# Altium PCB ECL.PcbDoc
Units mil, origin at the board's own origin, x right, y up, seen from the top; angles counter-clockwise.
Board outline 6000 x 4000 mil, 2 copper layers (Top Layer, Bottom Layer); 22 components, 15 nets, 52 pads, 0 vias.
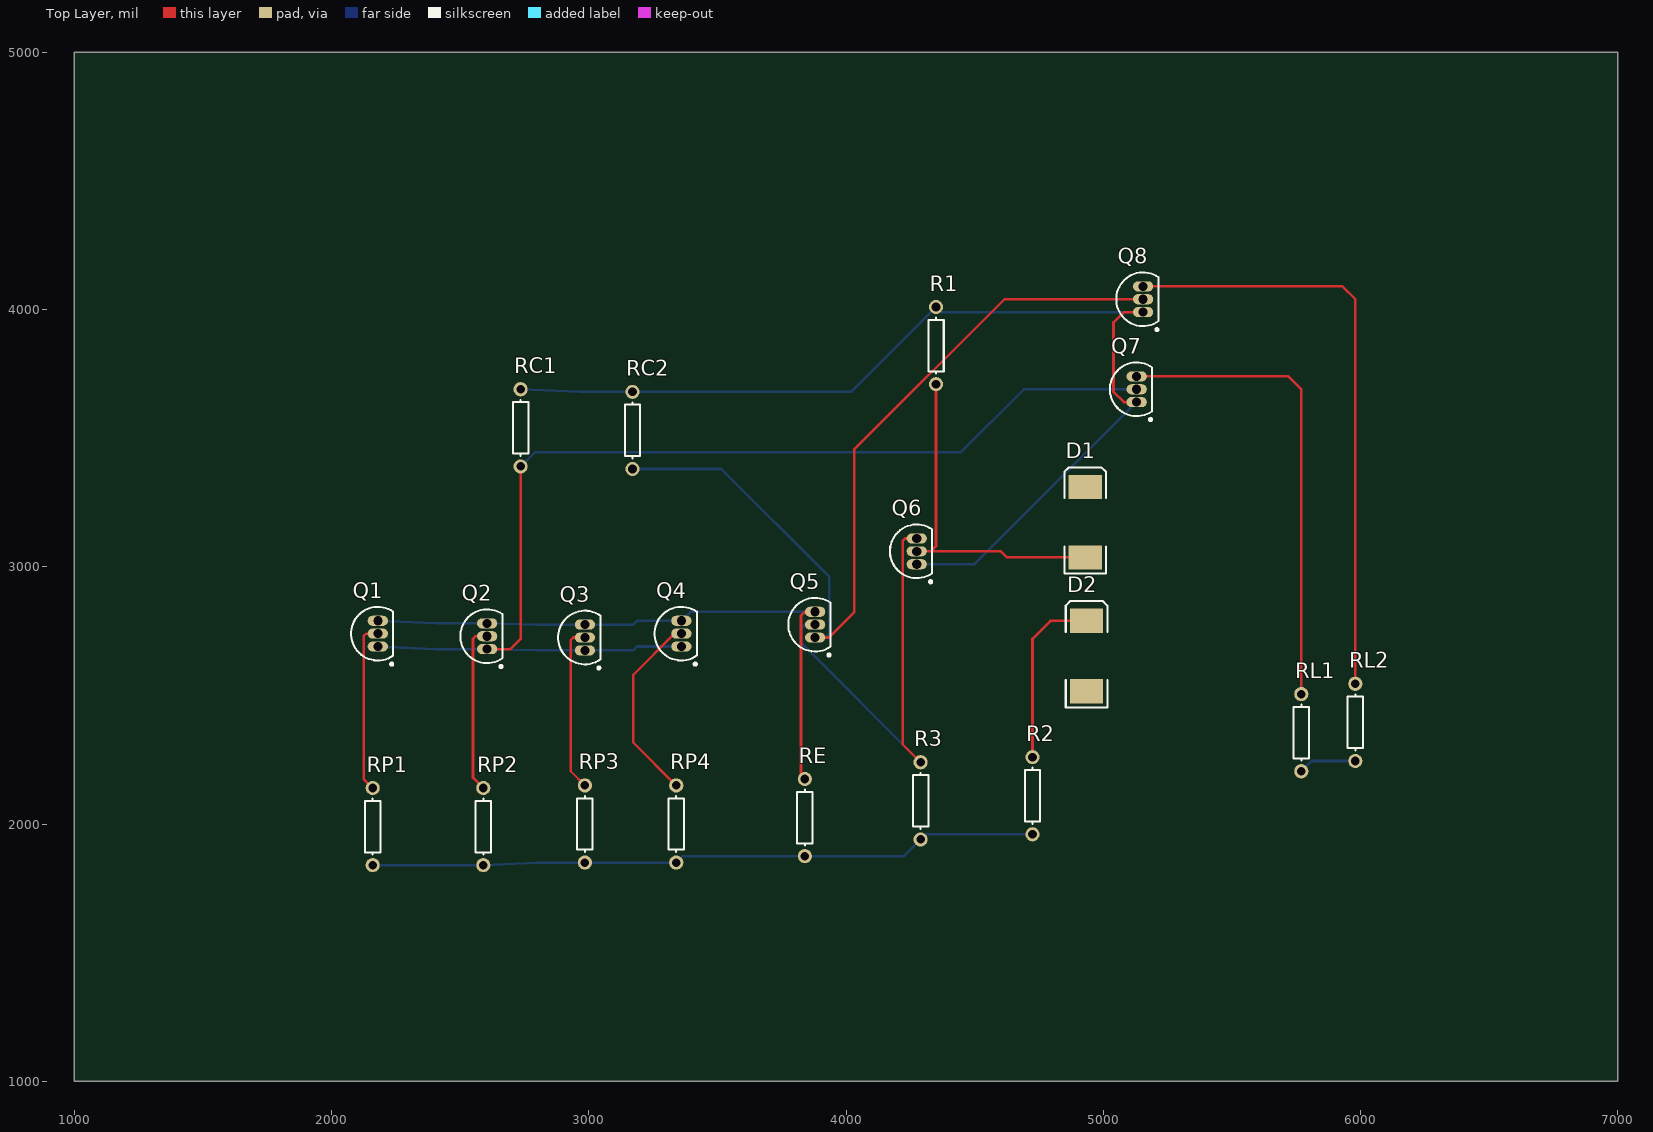
[diagram p0: Top Layer view]
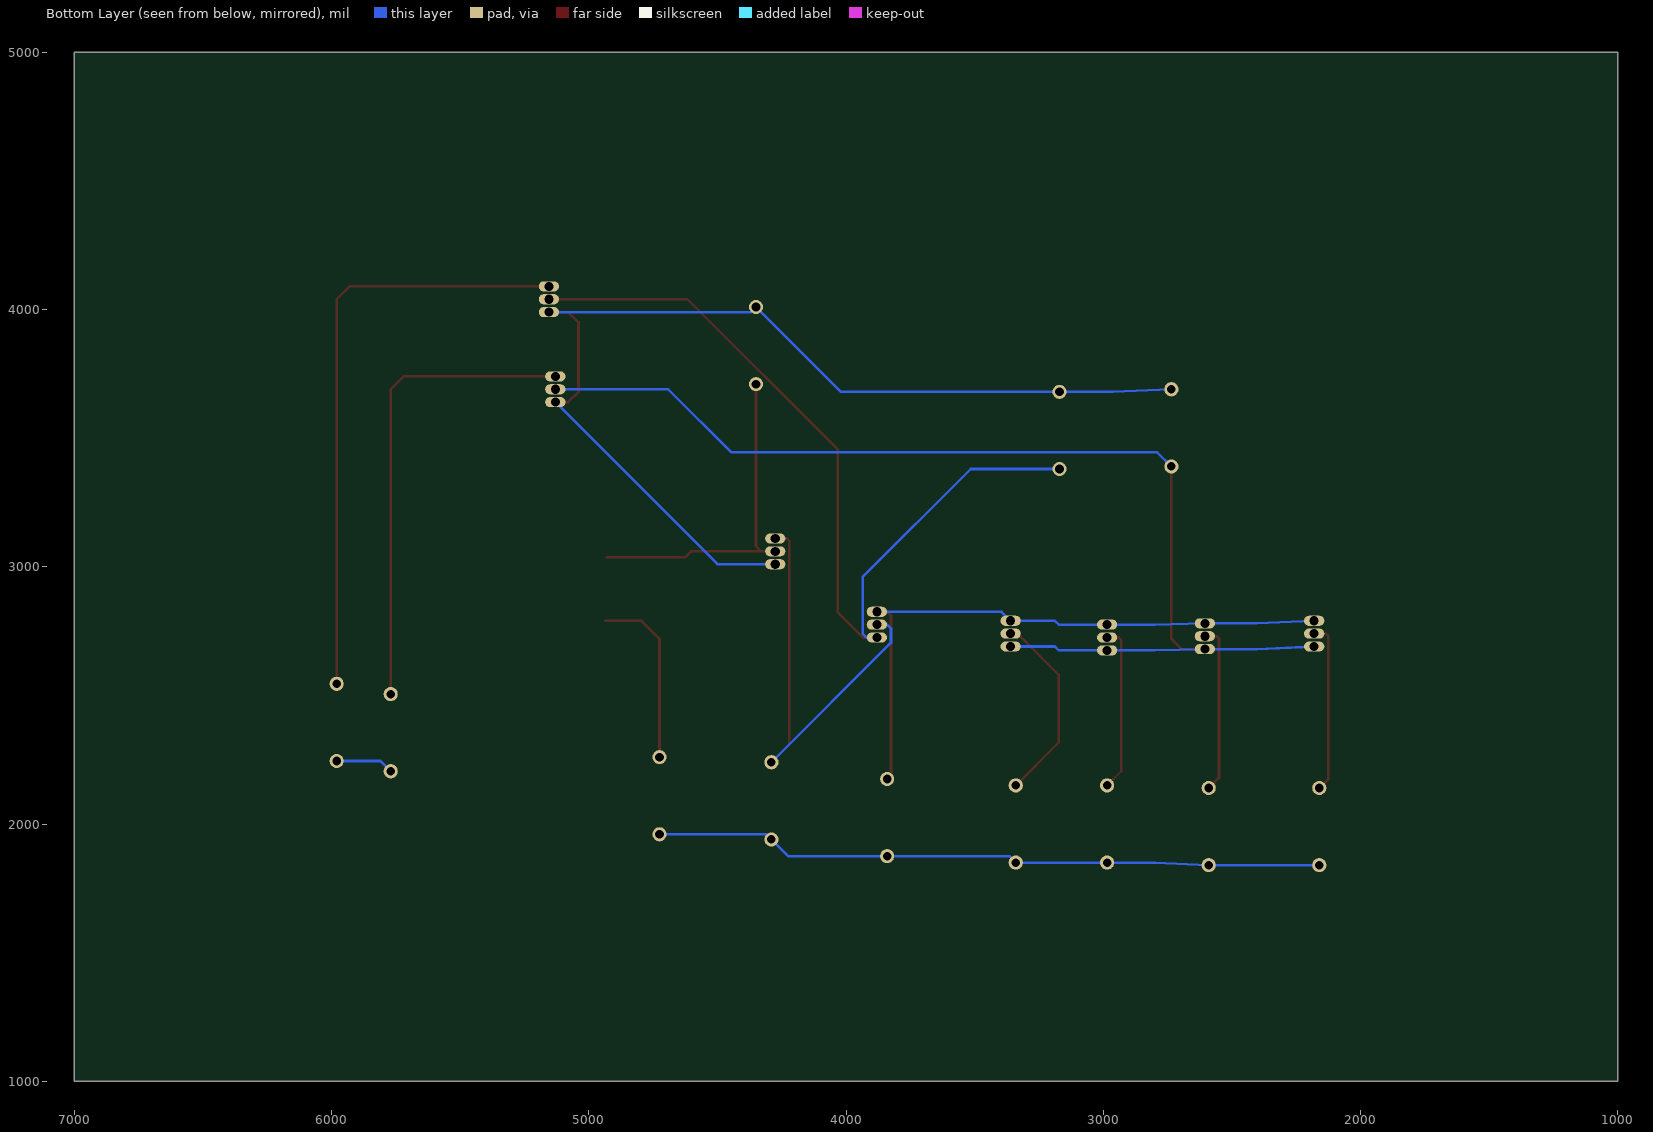
[diagram p1: Bottom Layer view, seen from below]

## Layer stack, top to bottom
Top Solder: solder mask 0.4, Solder Resist, Dk 3.5
Top Layer: signal copper 1.4
Dielectric 1: dielectric 12.6, FR-4, Dk 4.8
Bottom Layer: signal copper 1.4
Bottom Solder: solder mask 0.4, Solder Resist, Dk 3.5

## Board outline
1000,1000 7000,1000 7000,5000 1000,5000

## Design rules (kind name [scope] priority, off if disabled: settings)
Clearance [All] p1: gap=10 ignorepadtopadclearanceinfootprint=FALSE except(0: Arc-Hole Track-Hole SMDPad-Hole THPad-Hole Via-Hole Fill-Hole Poly-Hole Region-Hole Text-Hole)
PolygonConnect [All] p1: connectstyle=Relief reliefconductorwidth=10 reliefentries=4 polygonreliefangle="90 Angle" airgapwidth=10
RoomDefinition ECL [InComponentClass('ECL')] p1: confinementstyle=ConfineIn formatcopy=TRUE lockcomponents=FALSE outline 0,0 2000,0 2000,1000 0,1000
RoutingVias [All] p1: holewidth=28 width=50 viastyle="Through Hole" minholewidth=28 minwidth=50 maxholewidth=28 maxwidth=50
SolderMaskExpansion [All] p1: expansion=4 istentingtop=FALSE
Width [All] p1: maxlimit=10 minlimit=10 preferedwidth=10
30 further rules are at their usual default settings.

## Components (designator, comment, footprint, x,y, rotation, side; value= is the part's Value field where it differs from the comment)
D1 "Diode" SMC 4930,3173.19 r90 top
D2 "Diode" SMC 4935,2653.19 r90 top
Q1 "NPN" TO-226-AA 2180,2740 r0 top
Q2 "NPN" TO-226-AA 2605,2730 r0 top
Q3 "NPN" TO-226-AA 2985,2725 r0 top
Q4 "NPN" TO-226-AA 3360,2740 r0 top
Q5 "NPN" TO-226-AA 3880,2775 r0 top
Q6 "NPN" TO-226-AA 4275,3060 r0 top
Q7 "NPN" TO-226-AA 5130,3690 r0 top
Q8 "NPN" TO-226-AA 5155,4040 r0 top
R1 "Res1" AXIAL-0.3 4350,3860 r90 top value=907
R2 "Res1" AXIAL-0.3 4725,2110 r90 top value=4.98K
R3 "Res1" AXIAL-0.3 4290,2090 r90 top value=6.1K
RC1 "Res1" AXIAL-0.3 2735,3540 r90 top value=220
RC2 "Res1" AXIAL-0.3 3170,3530 r90 top value=245
RE "Res1" AXIAL-0.3 3840,2025 r90 top value=779
RL1 "Res1" AXIAL-0.3 5770,2355 r90 top value=1K
RL2 "Res1" AXIAL-0.3 5980,2395 r90 top value=1K
RP1 "Res1" AXIAL-0.3 2160,1990 r90 top value=5K
RP2 "Res1" AXIAL-0.3 2590,1990 r90 top value=5K
RP3 "Res1" AXIAL-0.3 2985,2000 r90 top value=5K
RP4 "Res1" AXIAL-0.3 3340,2000 r90 top value=5K

## Footprints (in the part's own frame and the unit in brackets; to place one, negate y for a bottom-side part, rotate by r counter-clockwise, add the part's x,y. Pads: shape width x height; smd on the part's side, far side on the other; paste and mask are expansions set on the pad)
AXIAL-0.3 [mm] "Axial Device, Thru-Hole; 2 Leads; 0.3 in Pin Spacing"
  round 1.4 hole 0.85: 1(-3.81,0) 2(3.81,0)
  silkscreen extent -2.77,-0.76 2.77,0.76
SMC [mm] "DO-214-AB/SMC; 2 C-Bend Leads; Body 7.9 x 5.9 mm, inc. leads (LxW)"
  rect 2.4x3.3 smd: 1(-3.475,0) 2(3.475,0)
  silkscreen extent -5.07,-2.05 5.43,2.06
TO-226-AA [mm] "TO, Flat Index; 3 In-Line, Axial Leads; Body Dia. 4.8mm; Leads 0.55 x 0.51 mm (max)"
  oval 2x1 hole 0.9: 1(0,-1.27) 2(0,0) 3(0,1.27)
  silkscreen extent -2.65,-3.13 1.52,2.65, body extent -2.65,-2.66 1.52,2.66, height 5.33

## Part data
D1 D2: "Default Diode", Code_JEDEC=DO-214-AB, LatestRevisionDate=17-Jul-2002, LatestRevisionNote="Re-released for DXP Platform.", PackageDescription="DO-214-AB/SMC; 2 C-Bend Leads; Body 7.9 x 5.9 mm, inc. leads (LxW)", PackageReference=SMC, PackageVersion=Sep-1996, Published=8-Jun-2000, Publisher="Altium Limited"
Q1 Q2 Q3 Q4 Q5 Q6 Q7 Q8: "NPN Bipolar Transistor", Code_JEDEC=TO-226-AA, LatestRevisionDate=17-Jul-2002, LatestRevisionNote="Re-released for DXP Platform.", PackageDescription="TO, Flat Index; 3 In-Line, Axial Leads; Body Dia. 4.8mm; Leads 0.55 x 0.51 mm (max)", PackageReference=TO-226-AA, Published=8-Jun-2000, Publisher="Altium Limited"
R1 R2 R3 RC1 RC2 RE RL1 RL2 RP1 RP2 RP3 RP4: "Resistor", LatestRevisionDate=17-Jul-2002, LatestRevisionNote="Re-released for DXP Platform.", PackageDescription="Axial Device, Thru-Hole; 2 Leads; 0.3 in Pin Spacing", PackageReference=AXIAL-0.3, Published=8-Jun-2000, Publisher="Altium Limited"

## Nets (pads, with @x,y where several pads share a name; then routed paths per layer and width w, separated by ;. In a path a pad name is that pad's centre, name@x,y a point inside that pad or via, vN(x,y) a via of type N, cw(c..) or ccw(c..) an arc to the next point about the centre after c; other vN are vias at no path point)
-5: R2.1 R3.1 RE.1 RP1.1 RP2.1 RP3.1 RP4.1 | length 2610.8
  Bottom Layer w10: RP1.1 RP2.1 2798,1850 RP3.1 RP4.1 3365,1875 RE.1 4225,1875 R3.1 4310,1960 R2.1
A: Q1.2 RP1.2 | length 663.6
  Top Layer w10: RP1.2 2125,2175 2125,2730 2135,2740 Q1.2
B: Q2.2 RP2.2 | length 655.7
  Top Layer w10: RP2.2 2550,2180 2550,2720 2560,2730 Q2.2
C: Q3.2 RP3.2 | length 646.9
  Top Layer w10: RP3.2 2930,2205 2930,2715 2940,2725 Q3.2
D: Q4.2 RP4.2 | length 752.4
  Top Layer w10: RP4.2 3173,2317 3173,2580 3333,2740 Q4.2
GND: Q6.1 Q7.1 Q8.1 R1.2 RC1.2 RC2.2 | length 4189.3
  Top Layer w10: Q7.1 5080,3640 5040,3680 5040,3950 5080,3990 Q8.1
  Bottom Layer w10: RC1.2 2963,3680 RC2.2 4020,3680 R1.2 4370,3990 Q8.1 ; Q6.1 4500,3010 Q7.1
NetD1_1: D1.1 Q6.2 R1.1 | length 1323.1
  Top Layer w10: Q6.2 4330,3060 ; R1.1 4350,3080 4330,3060 ; D1.1 4625.62,3036.38 4602,3060 4330,3060
NetD2_2: D2.2 R2.2 | length 699
  Top Layer w10: R2.2 4725,2720 4795,2790 D2.2
NetQ1_1: Q1.1 Q2.1 Q3.1 Q4.1 Q7.2 RC1.1 | length 4522.3
  Top Layer w10: Q2.1 2695,2680 2735,2720 RC1.1
  Bottom Layer w10: Q1.1 2403,2680 Q2.1 2800,2675 Q3.1 3173,2675 3188,2690 Q4.1 ; RC1.1 2790,3445 4446,3445 4691,3690 Q7.2
NetQ1_3: Q1.3 Q2.3 Q3.3 Q4.3 Q5.3 RE.2 | length 2432.2
  Top Layer w10: RE.2 3825,2175 3825,2810 3840,2825 Q5.3
  Bottom Layer w10: Q1.3 2403,2780 Q2.3 2800,2775 Q3.3 3173,2775 3188,2790 Q4.3 3395,2825 Q5.3
NetQ5_1: Q5.1 Q8.2 RC2.1 | length 3410.1
  Top Layer w10: Q5.1 3934,2725 4032,2823 4032,3455 4617,4040 Q8.2
  Bottom Layer w10: RC2.1 3515,3380 3935,2960 3935,2740 3920,2725 Q5.1
NetQ5_2: Q5.2 Q6.3 R3.2 | length 1722
  Top Layer w10: Q6.3 4230,3110 4220,3100 4220,2310 R3.2
  Bottom Layer w10: Q5.2 3840,2775 3825,2760 3825,2705 R3.2
VPU: RL1.1 RL2.1 | length 226.6
  Bottom Layer w10: RL1.1 5810,2245 RL2.1
Y: Q8.3 RL2.2 | length 2340.7
  Top Layer w10: Q8.3 5930,4090 5980,4040 RL2.2
Y': Q7.3 RL1.2 | length 1845.7
  Top Layer w10: Q7.3 5720,3740 5770,3690 RL1.2
pads on no net: D1.2 D2.1